# Altium PCB 底板20160428.PcbDoc (part 3 of 5)
Units mm, origin at the board's own origin, x right, y up, seen from the top; angles counter-clockwise.
Board outline 123.5 x 102.51 mm, 2 copper layers (Top Layer, Bottom Layer); 219 components, 217 nets, 791 pads, 260 vias.
Unrouted connection lines stored in the file: 1.
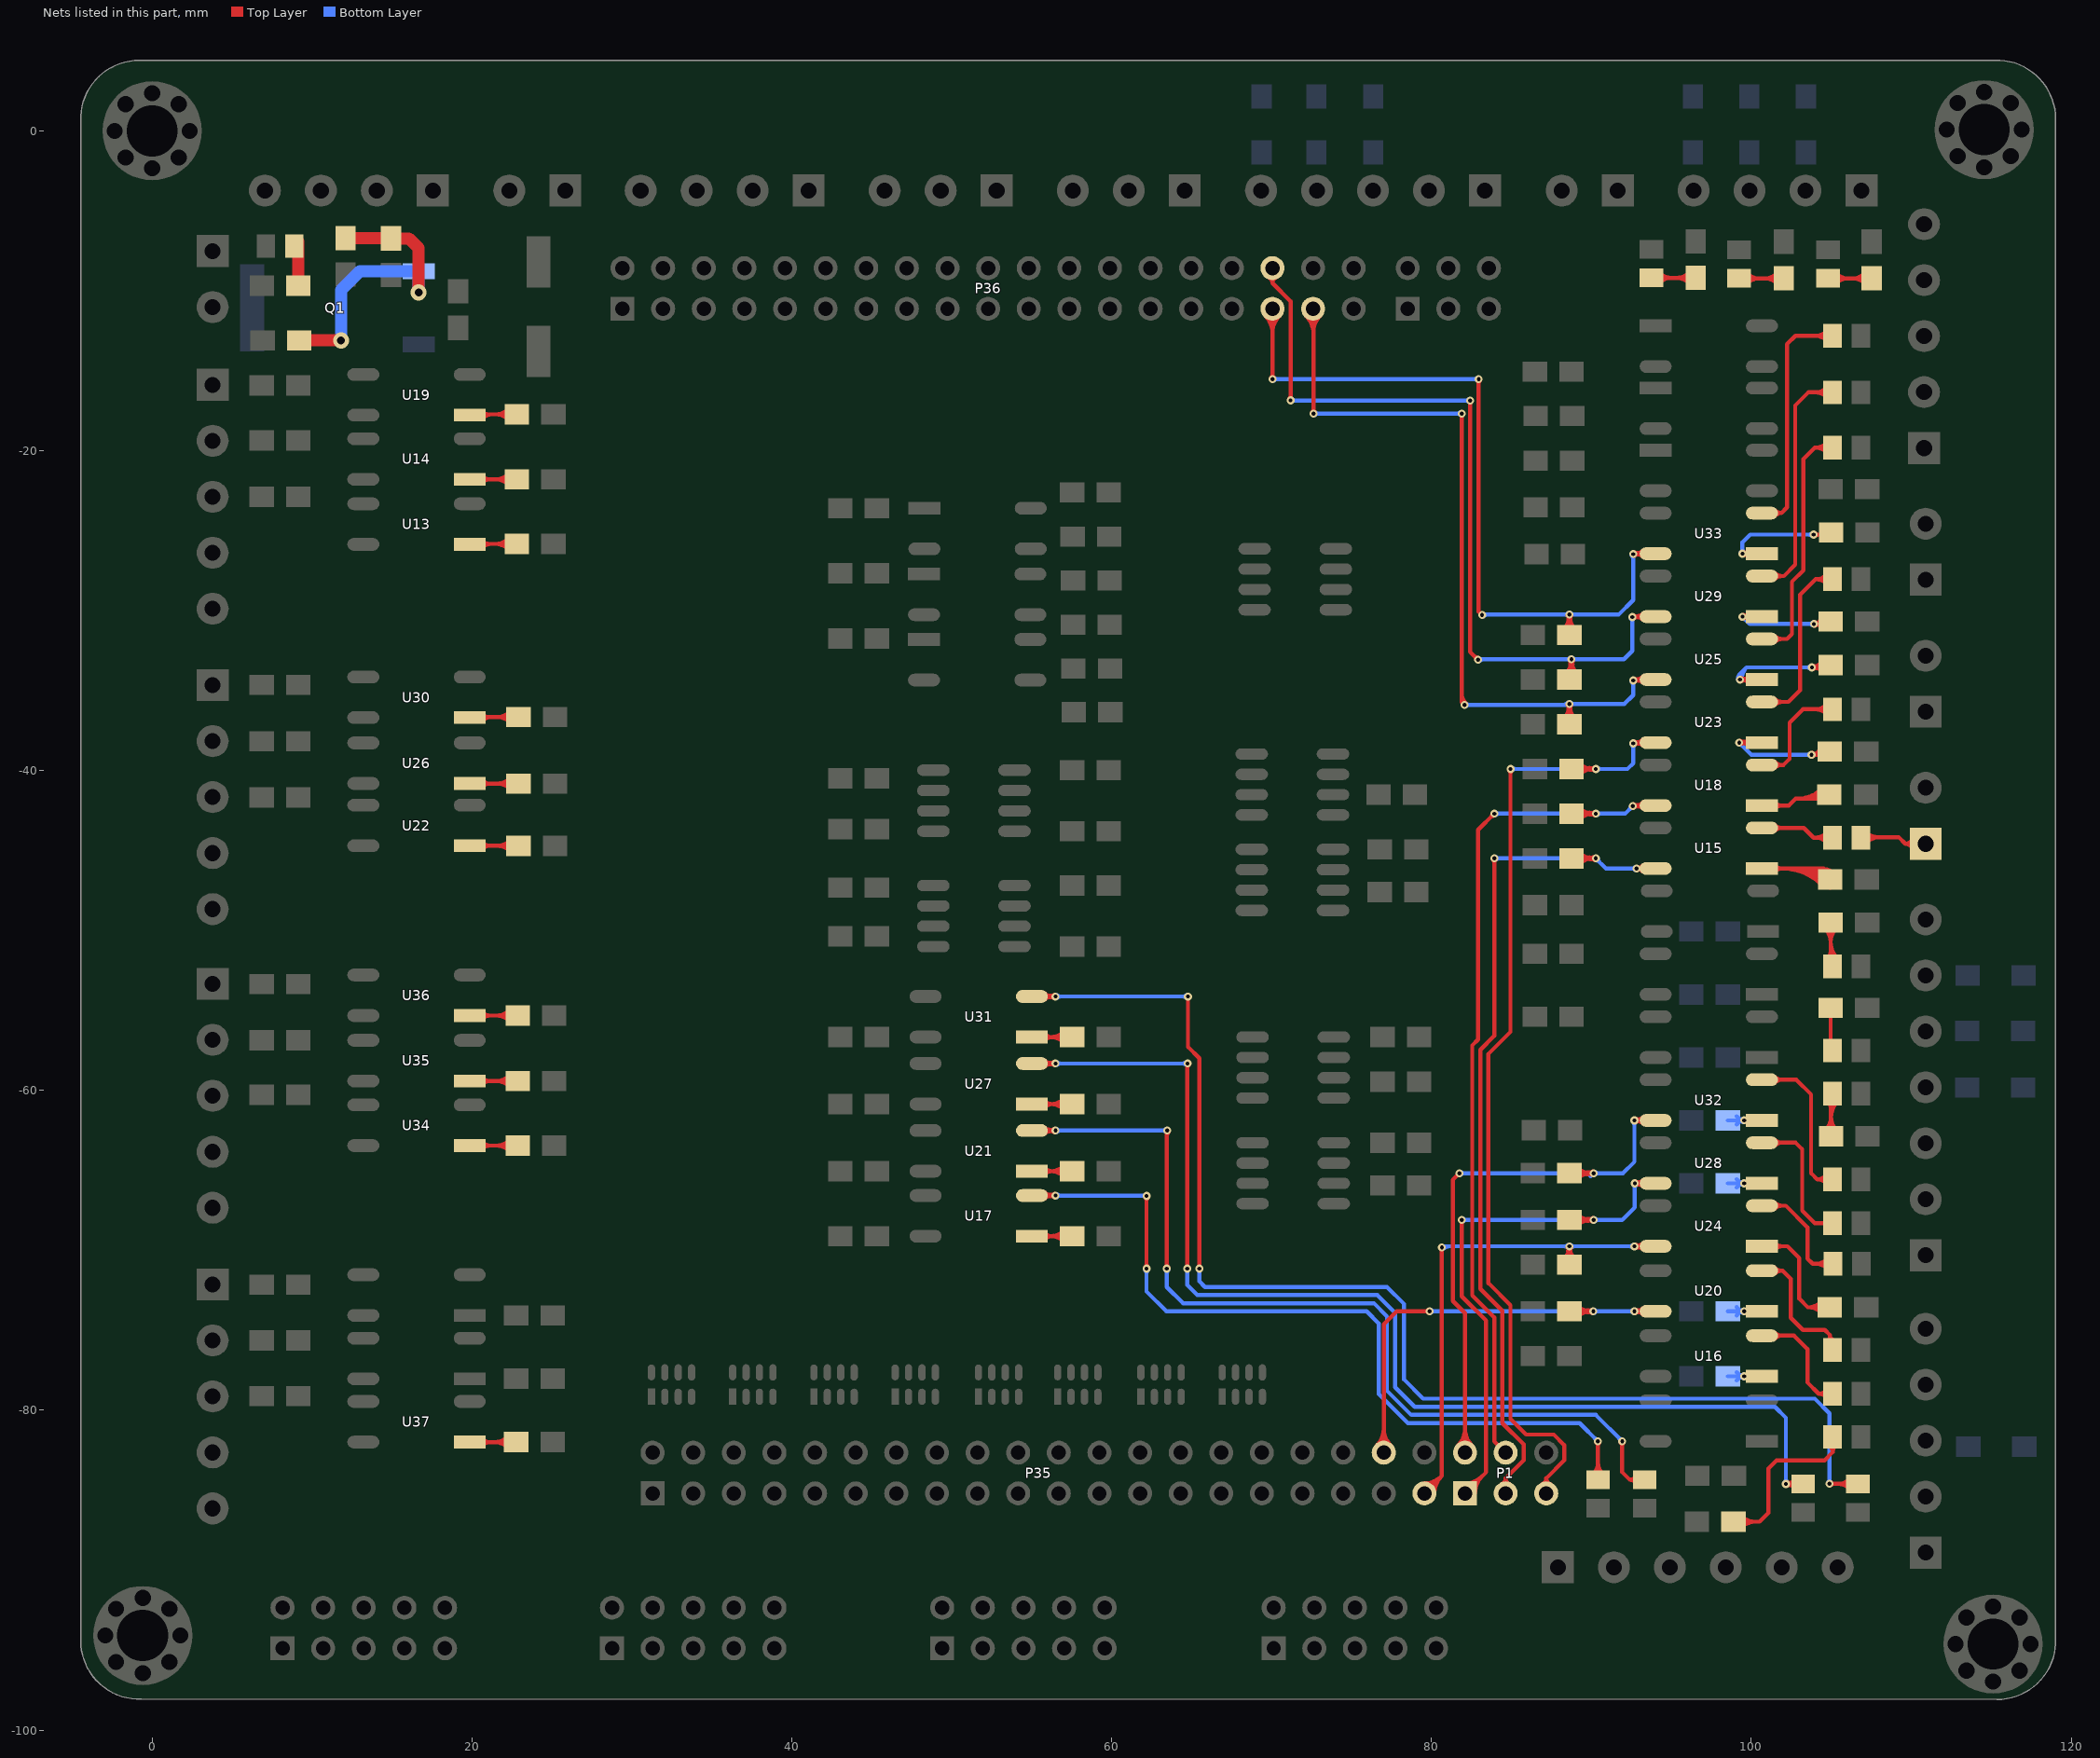
[diagram p3: the nets of this part, all layers, seen from the top]

## Via types
v1: diameter 0.5, hole 0.25, Top Layer to Bottom Layer, 233 vias
v2: diameter 1, hole 0.5, Top Layer to Bottom Layer, 27 vias

## Nets (pads, with @x,y where several pads share a name; then routed paths per layer and width w, separated by ;. In a path a pad name is that pad's centre, name@x,y a point inside that pad or via, vN(x,y) a via of type N, cw(c..) or ccw(c..) an arc to the next point about the centre after c; other vN are vias at no path point) (continued)
INPUT_30_B: P35.38 R58.1 U20.6 | length 38.8
  Top Layer w0.254: P35.38@76.572,-82.211 ccw(c75.509,-81.148) 77.013,-81.148 ccw(c78.517,-81.148) P35.38@77.453,-82.211 ; P35.38@76.752,-82.391 ccw(c76.122,-81.761) 77.013,-81.761 ccw(c77.904,-81.761) P35.38@77.274,-82.391 ; P35.38@77.013,-82.652 77.013,-74.625 77.826,-73.812 v1(79.883,-73.812) ; v1@79.796,-73.899 ccw(c79.586,-74.109) 79.586,-73.812 ccw(c79.586,-73.515) v1@79.796,-73.725 ; R58.1@88.621,-73.812 R58.1@88.621,-73.812 v1(90.119,-73.812) ; R58.1@89.107,-74.172 cw(c89.974,-75.039) 89.974,-73.812 cw(c89.974,-72.586) R58.1@89.107,-73.453 ; 89.735,-73.876 cw(c89.845,-74.287) v1@90.058,-73.919 ; 89.735,-73.748 ccw(c89.845,-73.338) v1@90.058,-73.706 ; v1@90.032,-73.899 ccw(c89.822,-74.109) 89.822,-73.812 ccw(c89.822,-73.515) v1@90.032,-73.725 ; v1@92.746,-73.919 cw(c92.926,-74.23) U20.6@93.019,-73.883 ; v1@92.746,-73.706 ccw(c92.922,-73.401) 93.013,-73.741 ; v1@92.772,-73.899 cw(c92.984,-74.112) 92.984,-73.811 ; v1@92.772,-73.725 ccw(c92.979,-73.518) 92.979,-73.811 ; v1@92.791,-73.874 cw(c93,-73.995) 92.938,-73.761 ; v1@92.791,-73.751 ccw(c92.994,-73.633) 92.934,-73.86 ; v1@92.812,-73.812 v1(92.685,-73.812) v1(92.685,-73.812) U20.6@94.01,-73.811 U20.6@94.082,-73.811 ; U20.6@93.217,-74.004 ccw(c92.751,-74.47) 92.751,-73.811 ccw(c92.751,-73.152) U20.6@93.217,-73.618
  Bottom Layer w0.254: v1(79.883,-73.812) v1(90.119,-73.812) v1(92.685,-73.812) 92.812,-73.812 v1@92.813,-73.811 ; v1@79.97,-73.899 cw(c80.18,-74.109) 80.18,-73.812 cw(c80.18,-73.515) v1@79.97,-73.725 ; v1@90.032,-73.899 ccw(c89.822,-74.109) 89.822,-73.812 ccw(c89.822,-73.515) v1@90.032,-73.725 ; v1@90.206,-73.899 cw(c90.416,-74.109) 90.416,-73.812 cw(c90.416,-73.515) v1@90.206,-73.725 ; v1@92.598,-73.899 ccw(c92.388,-74.109) 92.388,-73.812 ccw(c92.388,-73.515) v1@92.598,-73.725
INPUT_31_B: P35.39 R66.1 U24.6 | length 41.6
  Top Layer w0.254: P35.39@79.553,-85.192 80.641,-84.103 80.641,-70.913 v1(80.645,-69.825) ; P35.39@79.553,-84.823 ccw(c79.553,-83.932) 80.183,-84.562 ccw(c80.813,-85.192) P35.39@79.922,-85.192 ; P35.39@79.553,-84.569 ccw(c79.553,-83.065) 80.616,-84.128 ccw(c81.68,-85.192) P35.39@80.176,-85.192 ; R66.1@88.28,-70.514 ccw(c87.589,-69.748) v1(88.621,-69.748) ; v1@88.514,-69.81 cw(c88.257,-69.958) 88.544,-70.035 cw(c88.831,-70.112) v1@88.682,-69.855 ; v1@88.534,-69.835 cw(c88.324,-70.045) 88.621,-70.045 cw(c88.918,-70.045) v1@88.708,-69.835 ; v1@88.559,-69.855 cw(c88.411,-70.112) 88.697,-70.035 cw(c88.984,-69.958) v1@88.727,-69.81 ; R66.1@88.621,-70.891 v1(88.621,-69.748) ; R66.1@88.961,-70.514 cw(c89.652,-69.748) v1(88.621,-69.748) ; v1(92.685,-69.748) v1(92.685,-69.748) U24.6@94.01,-69.747 U24.6@94.082,-69.747 ; v1@92.746,-69.855 cw(c92.926,-70.166) U24.6@93.019,-69.819 ; v1@92.746,-69.642 ccw(c92.922,-69.337) 93.013,-69.677 ; v1@92.772,-69.835 cw(c92.984,-70.048) 92.984,-69.747 ; v1@92.772,-69.661 ccw(c92.979,-69.454) 92.979,-69.747 ; v1@92.791,-69.81 cw(c93,-69.931) 92.938,-69.697 ; v1@92.791,-69.687 ccw(c92.994,-69.569) 92.934,-69.796 ; U24.6@93.217,-69.94 ccw(c92.751,-70.406) 92.751,-69.747 ccw(c92.751,-69.088) U24.6@93.217,-69.554
  Bottom Layer w0.254: v1(80.645,-69.825) 80.721,-69.748 v1(88.621,-69.748) v1(92.685,-69.748) ; v1@80.732,-69.912 cw(c81.126,-70.306) 81.126,-69.748 ; v1@88.534,-69.835 ccw(c88.324,-70.045) 88.324,-69.748 ccw(c88.324,-69.451) v1@88.534,-69.661 ; v1@88.708,-69.835 cw(c88.918,-70.045) 88.918,-69.748 cw(c88.918,-69.451) v1@88.708,-69.661 ; v1@92.598,-69.835 ccw(c92.388,-70.045) 92.388,-69.748 ccw(c92.388,-69.451) v1@92.598,-69.661
INPUT_32_B: P1.1 R74.1 U28.6 | length 45
  Top Layer w0.254: v1(81.89,-68.097) 81.89,-72.873 83.414,-74.397 83.414,-83.871 P1.1@82.093,-85.192 ; P1.1@82.093,-84.823 ccw(c82.093,-83.932) 82.723,-84.562 ccw(c83.353,-85.192) P1.1@82.462,-85.192 ; P1.1@82.093,-84.569 ccw(c82.093,-83.065) 83.156,-84.128 ccw(c84.22,-85.192) P1.1@82.716,-85.192 ; R74.1@88.621,-68.097 v1(90.145,-68.097) ; R74.1@89.107,-68.457 cw(c89.974,-69.324) 89.974,-68.097 cw(c89.974,-66.871) R74.1@89.107,-67.738 ; 89.743,-68.159 cw(c89.859,-68.592) v1@90.083,-68.204 ; 89.743,-68.036 ccw(c89.859,-67.603) v1@90.083,-67.991 ; v1@90.058,-68.184 ccw(c89.848,-68.394) 89.848,-68.097 ccw(c89.848,-67.8) v1@90.058,-68.01 ; v1(92.71,-65.811) 94.009,-65.811 U28.6@94.01,-65.81 U28.6@94.082,-65.81 ; v1@92.749,-65.811 ccw(c92.749,-65.149) U28.6@93.217,-65.617 ; v1@92.754,-65.811 cw(c92.754,-66.467) U28.6@93.217,-66.003 ; v1@92.772,-65.918 cw(c92.939,-66.208) U28.6@93.026,-65.884 ; v1@92.771,-65.705 ccw(c92.937,-65.418) U28.6@93.023,-65.738 ; v1@92.797,-65.898 cw(c93.007,-66.108) 93.007,-65.811 cw(c93.007,-65.514) v1@92.797,-65.724 ; v1@92.817,-65.873 cw(c93.044,-66.004) 92.976,-65.75 ; v1@92.817,-65.75 ccw(c93.04,-65.621) 92.973,-65.87
  Bottom Layer w0.254: v1(81.89,-68.097) v1(90.145,-68.097) 91.923,-68.097 92.71,-67.31 v1(92.71,-65.811) ; v1@81.977,-68.184 cw(c82.187,-68.394) 82.187,-68.097 cw(c82.187,-67.8) v1@81.977,-68.01 ; v1@90.058,-68.184 ccw(c89.848,-68.394) 89.848,-68.097 ccw(c89.848,-67.8) v1@90.058,-68.01 ; v1@90.232,-68.184 cw(c90.442,-68.394) 90.442,-68.097 cw(c90.442,-67.8) v1@90.232,-68.01 ; v1@92.623,-65.898 cw(c92.413,-66.108) 92.71,-66.108 cw(c93.007,-66.108) v1@92.797,-65.898
INPUT_33_B: P1.2 R82.1 U32.6 | length 45.6
  Top Layer w0.254: P1.2@81.652,-82.211 ccw(c80.589,-81.148) 82.093,-81.148 ccw(c83.597,-81.148) P1.2@82.533,-82.211 ; v1(81.737,-65.176) 81.331,-65.583 81.331,-73.17 82.093,-73.932 P1.2@82.093,-82.652 ; P1.2@81.832,-82.391 ccw(c81.202,-81.761) 82.093,-81.761 ccw(c82.984,-81.761) P1.2@82.354,-82.391 ; R82.1@88.621,-65.176 v1(90.145,-65.176) ; R82.1@89.107,-65.536 cw(c89.974,-66.403) 89.974,-65.176 cw(c89.974,-63.95) R82.1@89.107,-64.817 ; 89.743,-65.238 cw(c89.859,-65.671) v1@90.083,-65.283 ; 89.743,-65.115 ccw(c89.859,-64.682) v1@90.083,-65.07 ; v1@90.058,-65.263 ccw(c89.848,-65.473) 89.848,-65.176 ccw(c89.848,-64.879) v1@90.058,-65.089 ; v1(92.685,-61.874) 94.009,-61.874 U32.6@94.01,-61.873 U32.6@94.082,-61.873 ; v1@92.746,-61.981 cw(c92.925,-62.291) U32.6@93.018,-61.945 ; v1@92.746,-61.768 ccw(c92.923,-61.462) 93.014,-61.803 ; v1@92.749,-61.874 ccw(c92.749,-61.212) U32.6@93.217,-61.68 ; v1@92.754,-61.874 cw(c92.754,-62.53) U32.6@93.217,-62.066 ; v1@92.772,-61.961 cw(c92.982,-62.171) 92.982,-61.874 cw(c92.982,-61.577) v1@92.772,-61.787 ; v1@92.791,-61.936 cw(c92.999,-62.056) 92.937,-61.824 ; v1@92.791,-61.813 ccw(c92.996,-61.695) 92.934,-61.923
  Bottom Layer w0.254: v1(81.737,-65.176) 89.757,-65.176 89.951,-65.37 v1(90.145,-65.176) 91.973,-65.176 92.685,-64.465 v1(92.685,-61.874) ; v1@81.824,-65.263 cw(c82.034,-65.473) 82.034,-65.176 cw(c82.034,-64.879) v1@81.824,-65.089 ; v1@90.232,-65.263 cw(c90.442,-65.473) 90.442,-65.176 cw(c90.442,-64.879) v1@90.232,-65.089 ; v1@92.598,-61.961 cw(c92.388,-62.171) 92.685,-62.171 cw(c92.982,-62.171) v1@92.772,-61.961
INPUT_34_B: P1.3 R49.1 U15.6 | length 62.1
  Top Layer w0.254: v1@83.835,-45.578 cw(c83.625,-45.788) 83.922,-45.788 cw(c84.219,-45.788) v1@84.009,-45.578 ; v1(83.922,-45.491) 83.922,-56.591 83.052,-57.461 83.052,-72.409 84.43,-73.787 84.43,-80.797 85.764,-82.132 85.764,-83.12 84.633,-84.251 ; P1.3@84.39,-84.618 ccw(c84.234,-84.251) 84.633,-84.251 ; P1.3@84.633,-85.192 84.633,-84.251 ; P1.3@84.876,-84.618 cw(c85.031,-84.251) 84.633,-84.251 ; R49.1@88.748,-45.491 v1(90.272,-45.491) ; R49.1@89.234,-45.851 cw(c90.101,-46.718) 90.101,-45.491 cw(c90.101,-44.265) R49.1@89.234,-45.132 ; 89.87,-45.553 cw(c89.986,-45.986) v1@90.21,-45.598 ; 89.87,-45.43 ccw(c89.986,-44.997) v1@90.21,-45.385 ; v1@90.185,-45.578 ccw(c89.975,-45.788) 89.975,-45.491 ccw(c89.975,-45.194) v1@90.185,-45.404 ; v1(92.812,-46.126) v1(92.812,-46.126) ; v1@92.88,-46.024 ccw(c93.011,-45.827) 93.073,-46.056 ccw(c93.133,-46.282) v1@92.922,-46.18 ; v1@92.882,-46.227 cw(c93.011,-46.411) 93.069,-46.194 cw(c93.128,-45.973) v1@92.922,-46.073 ; v1@92.899,-46.213 cw(c93.111,-46.426) U15.6@93.111,-46.125 ; v1@92.899,-46.039 ccw(c93.106,-45.832) U15.6@93.106,-46.125 ; U15.6@93.204,-46.304 ccw(c92.813,-46.643) v1(92.812,-46.126) ; U15.6@93.204,-45.947 cw(c92.813,-45.608) v1(92.812,-46.126) ; U15.6@94.082,-46.125 U15.6@94.01,-46.125 v1(92.812,-46.126)
  Bottom Layer w0.254: v1(83.922,-45.491) v1(90.272,-45.491) 90.907,-46.126 v1(92.812,-46.126) ; v1@84.009,-45.578 cw(c84.219,-45.788) 84.219,-45.491 cw(c84.219,-45.194) v1@84.009,-45.404 ; v1@90.185,-45.578 ccw(c89.975,-45.788) 89.975,-45.491 ccw(c89.975,-45.194) v1@90.185,-45.404 ; v1@90.272,-45.614 cw(c90.272,-45.911) 90.482,-45.701 cw(c90.692,-45.491) v1@90.395,-45.491 ; v1@92.725,-46.213 ccw(c92.515,-46.423) 92.515,-46.126 ccw(c92.515,-45.829) v1@92.725,-46.039
INPUT_35_B: P1.4 R57.1 U18.6 | length 60.8
  Top Layer w0.254: v1@83.799,-42.697 cw(c83.502,-42.697) 83.712,-42.907 cw(c83.922,-43.117) v1@83.922,-42.82 ; v1(83.922,-42.697) 82.906,-43.713 82.906,-56.82 82.544,-57.182 82.544,-72.815 83.922,-74.193 83.922,-81.94 P1.4@84.633,-82.652 ; R57.1@88.748,-42.697 v1(90.272,-42.697) ; R57.1@89.234,-43.057 cw(c90.101,-43.924) 90.101,-42.697 cw(c90.101,-41.471) R57.1@89.234,-42.338 ; 89.87,-42.759 cw(c89.986,-43.192) v1@90.21,-42.804 ; 89.87,-42.636 ccw(c89.986,-42.203) v1@90.21,-42.591 ; v1@90.185,-42.784 ccw(c89.975,-42.994) 89.975,-42.697 ccw(c89.975,-42.4) v1@90.185,-42.61 ; v1(92.583,-42.215) 92.609,-42.188 U18.6@94.01,-42.188 U18.6@94.082,-42.188 ; v1@92.645,-42.108 ccw(c92.824,-41.798) 92.916,-42.144 ; v1@92.66,-42.31 cw(c92.876,-42.577) 92.965,-42.246 ; v1@92.67,-42.302 cw(c92.944,-42.576) 92.944,-42.188 ; v1@92.69,-42.276 cw(c92.893,-42.394) 92.833,-42.167 ; U18.6@93.217,-42.381 ccw(c92.751,-42.847) 92.751,-42.188 ccw(c92.751,-41.529) U18.6@93.217,-41.995
  Bottom Layer w0.254: v1(83.922,-42.697) v1(90.272,-42.697) 92.1,-42.697 v1(92.583,-42.215) ; v1@84.009,-42.784 cw(c84.219,-42.994) 84.219,-42.697 cw(c84.219,-42.4) v1@84.009,-42.61 ; v1@90.185,-42.784 ccw(c89.975,-42.994) 89.975,-42.697 ccw(c89.975,-42.4) v1@90.185,-42.61 ; v1@90.359,-42.784 cw(c90.569,-42.994) 90.569,-42.697 cw(c90.569,-42.4) v1@90.359,-42.61 ; v1@92.46,-42.215 cw(c92.163,-42.215) 92.373,-42.425 cw(c92.583,-42.635) v1@92.583,-42.338
INPUT_36_B: P1.5 R65.1 U23.6 | length 69.7
  Top Layer w0.254: v1@84.851,-39.99 cw(c84.641,-40.2) 84.938,-40.2 cw(c85.235,-40.2) v1@85.025,-39.99 ; v1(84.938,-39.903) 84.938,-56.337 83.56,-57.715 83.56,-72.053 84.938,-73.431 84.938,-80.543 85.915,-81.521 87.641,-81.521 88.304,-82.183 88.304,-83.12 87.173,-84.251 ; P1.5@86.93,-84.618 ccw(c86.774,-84.251) 87.173,-84.251 ; P1.5@87.173,-85.192 87.173,-84.251 ; P1.5@87.416,-84.618 cw(c87.571,-84.251) 87.173,-84.251 ; R65.1@88.748,-39.903 v1(90.272,-39.903) ; R65.1@89.234,-40.263 cw(c90.101,-41.13) 90.101,-39.903 cw(c90.101,-38.677) R65.1@89.234,-39.544 ; 89.87,-39.965 cw(c89.986,-40.398) v1@90.21,-40.01 ; 89.87,-39.842 ccw(c89.986,-39.409) v1@90.21,-39.797 ; v1@90.185,-39.99 ccw(c89.975,-40.2) 89.975,-39.903 ccw(c89.975,-39.606) v1@90.185,-39.816 ; v1(92.608,-38.303) 93.958,-38.303 U23.6@94.01,-38.251 U23.6@94.082,-38.251 ; v1@92.626,-38.303 ccw(c92.626,-37.467) U23.6@93.217,-38.058 ; v1@92.67,-38.197 ccw(c92.826,-37.926) 92.907,-38.228 ; v1@92.695,-38.39 cw(c92.905,-38.6) 92.905,-38.303 cw(c92.905,-38.006) v1@92.695,-38.216 ; v1@92.715,-38.365 cw(c92.959,-38.505) 92.886,-38.234 ; 92.876,-38.303 cw(c92.876,-38.785) U23.6@93.217,-38.444
  Bottom Layer w0.254: v1(84.938,-39.903) v1(90.272,-39.903) 92.253,-39.903 92.608,-39.548 v1(92.608,-38.303) ; v1@85.025,-39.99 cw(c85.235,-40.2) 85.235,-39.903 cw(c85.235,-39.606) v1@85.025,-39.816 ; v1@90.185,-39.99 ccw(c89.975,-40.2) 89.975,-39.903 ccw(c89.975,-39.606) v1@90.185,-39.816 ; v1@90.359,-39.99 cw(c90.569,-40.2) 90.569,-39.903 cw(c90.569,-39.606) v1@90.359,-39.816 ; v1@92.521,-38.39 cw(c92.311,-38.6) 92.608,-38.6 cw(c92.905,-38.6) v1@92.695,-38.39
INPUT_37_B: P36.35 R67.1 U25.6 | length 61.8
  Top Layer w0.254: P36.35@72.153,-11.566 cw(c71.028,-12.691) 72.619,-12.691 ; P36.35@72.332,-11.386 cw(c71.641,-12.077) 72.619,-12.077 ; v1@72.532,-17.591 ccw(c72.322,-17.381) 72.619,-17.381 ccw(c72.916,-17.381) v1@72.706,-17.591 ; v1(72.619,-17.678) P36.35@72.619,-11.151 ; 72.619,-12.568 cw(c74.036,-12.568) P36.35@73.034,-11.566 ; 72.619,-11.955 cw(c73.423,-11.955) P36.35@72.854,-11.386 ; 81.89,-35.164 ccw(c82.794,-35.164) v1@82.154,-35.803 ; v1(81.89,-17.678) 81.89,-35.712 ; v1@81.945,-35.875 ccw(c81.751,-35.851) 81.89,-35.712 ; v1@82.052,-35.768 cw(c82.028,-35.574) 81.89,-35.712 ; v1(82.067,-35.89) 81.89,-35.712 ; R67.1@88.261,-36.75 ccw(c87.394,-35.883) 88.621,-35.883 ccw(c89.847,-35.883) R67.1@88.98,-36.75 ; v1@88.514,-35.901 cw(c88.224,-36.069) 88.548,-36.155 ; v1@88.534,-35.926 cw(c88.324,-36.136) 88.621,-36.136 cw(c88.918,-36.136) v1@88.708,-35.926 ; v1@88.559,-35.946 cw(c88.43,-36.17) 88.68,-36.103 ; 88.562,-36.103 cw(c88.811,-36.17) v1@88.682,-35.946 ; R67.1@88.621,-37.109 v1(88.621,-35.839) ; 88.694,-36.155 cw(c89.018,-36.069) v1@88.727,-35.901 ; v1(92.608,-34.366) 93.958,-34.366 U25.6@94.01,-34.314 U25.6@94.082,-34.314 ; v1@92.626,-34.366 ccw(c92.626,-33.53) U25.6@93.217,-34.121 ; v1@92.67,-34.26 ccw(c92.826,-33.989) 92.907,-34.291 ; v1@92.695,-34.453 cw(c92.905,-34.663) 92.905,-34.366 cw(c92.905,-34.069) v1@92.695,-34.279 ; v1@92.715,-34.428 cw(c92.959,-34.568) 92.886,-34.297 ; 92.876,-34.366 cw(c92.876,-34.848) U25.6@93.217,-34.507
  Bottom Layer w0.254: v1(72.619,-17.678) v1(81.89,-17.678) ; v1@72.706,-17.765 cw(c72.916,-17.975) 72.916,-17.678 cw(c72.916,-17.381) v1@72.706,-17.591 ; v1@81.803,-17.765 ccw(c81.593,-17.975) 81.593,-17.678 ccw(c81.593,-17.381) v1@81.803,-17.591 ; v1(82.067,-35.89) 88.57,-35.89 v1(88.621,-35.839) 92.05,-35.839 92.608,-35.281 v1(92.608,-34.366) ; v1@82.154,-35.977 cw(c82.364,-36.187) 82.364,-35.89 cw(c82.364,-35.593) v1@82.154,-35.803 ; 88.201,-35.89 ccw(c88.201,-35.42) v1@88.534,-35.752 ; v1@88.708,-35.926 cw(c88.918,-36.136) 88.918,-35.839 cw(c88.918,-35.542) v1@88.708,-35.752 ; v1@92.521,-34.453 cw(c92.311,-34.663) 92.608,-34.663 cw(c92.905,-34.663) v1@92.695,-34.453
INPUT_38_B: P36.34 R75.1 U29.6 | length 60.9
  Top Layer w0.254: P36.34@69.81,-9.159 cw(c69.655,-9.526) 70.053,-9.526 ; P36.34@70.053,-8.585 70.053,-9.526 ; P36.34@70.296,-9.159 ccw(c70.452,-9.526) 70.053,-9.526 ; v1@71.097,-16.767 ccw(c70.887,-16.557) 71.184,-16.557 ccw(c71.481,-16.557) v1@71.271,-16.767 ; v1(71.184,-16.854) 71.184,-10.657 70.053,-9.526 ; v1(82.419,-16.87) 82.419,-32.584 v1(82.906,-33.071) ; v1@82.783,-33.071 ccw(c82.486,-33.071) 82.696,-32.861 ccw(c82.906,-32.651) v1@82.906,-32.948 ; R75.1@88.388,-33.956 ccw(c87.521,-33.089) 88.748,-33.089 ccw(c89.974,-33.089) R75.1@89.107,-33.956 ; R75.1@88.621,-34.315 88.748,-34.188 v1(88.748,-33.045) ; v1@88.641,-33.107 cw(c88.351,-33.275) 88.675,-33.361 ; v1@88.661,-33.132 cw(c88.451,-33.342) 88.748,-33.342 cw(c89.045,-33.342) v1@88.835,-33.132 ; v1@88.686,-33.152 cw(c88.557,-33.376) 88.807,-33.309 ; 88.689,-33.309 cw(c88.938,-33.376) v1@88.809,-33.152 ; 88.821,-33.361 cw(c89.145,-33.275) v1@88.854,-33.107 ; v1(92.558,-30.404) 93.984,-30.404 U29.6@94.01,-30.377 U29.6@94.082,-30.377 ; v1@92.619,-30.297 ccw(c92.825,-29.941) 92.931,-30.338 ; v1@92.645,-30.491 cw(c92.855,-30.701) 92.855,-30.404 cw(c92.855,-30.107) v1@92.645,-30.317 ; v1@92.687,-30.404 ccw(c92.687,-29.655) U29.6@93.217,-30.184 ; 92.815,-30.404 cw(c92.815,-30.973) U29.6@93.217,-30.57
  Bottom Layer w0.254: v1@71.184,-16.866 71.188,-16.87 v1(82.419,-16.87) ; v1@71.271,-16.941 cw(c71.443,-17.112) 71.443,-16.87 ; v1@71.271,-16.767 ccw(c71.52,-16.518) 71.52,-16.87 ; v1@82.332,-16.957 ccw(c82.122,-17.167) 82.122,-16.87 ccw(c82.122,-16.573) v1@82.332,-16.783 ; v1@82.906,-33.045 v1(88.748,-33.045) 92.024,-33.045 92.558,-32.512 v1(92.558,-30.404) ; v1@82.993,-33.158 cw(c83.264,-33.429) 83.264,-33.045 ; v1@88.661,-33.132 ccw(c88.451,-33.342) 88.451,-33.045 ccw(c88.451,-32.748) v1@88.661,-32.958 ; v1@88.835,-33.132 cw(c89.045,-33.342) 89.045,-33.045 cw(c89.045,-32.748) v1@88.835,-32.958 ; v1@92.471,-30.491 cw(c92.261,-30.701) 92.558,-30.701 cw(c92.855,-30.701) v1@92.645,-30.491
INPUT_39_B: P36.33 R83.1 U33.6 | length 60.3
  Top Layer w0.254: P36.33@69.613,-11.566 cw(c68.549,-12.629) 70.053,-12.629 cw(c71.557,-12.629) P36.33@70.494,-11.566 ; P36.33@69.792,-11.386 cw(c69.162,-12.016) 70.053,-12.016 cw(c70.944,-12.016) P36.33@70.314,-11.386 ; v1@69.966,-15.432 ccw(c69.756,-15.222) 70.053,-15.222 ccw(c70.35,-15.222) v1@70.14,-15.432 ; v1(70.053,-15.519) P36.33@70.053,-11.125 ; v1@82.861,-15.614 cw(c82.651,-15.824) 82.948,-15.824 cw(c83.245,-15.824) v1@83.035,-15.614 ; v1(82.948,-15.527) 82.948,-30.066 v1(83.16,-30.277) ; R83.1@88.261,-31.162 ccw(c87.394,-30.295) 88.621,-30.295 ccw(c89.847,-30.295) R83.1@88.98,-31.162 ; v1@88.514,-30.313 cw(c88.224,-30.481) 88.548,-30.567 ; v1@88.534,-30.338 cw(c88.324,-30.548) 88.621,-30.548 cw(c88.918,-30.548) v1@88.708,-30.338 ; v1@88.559,-30.358 cw(c88.43,-30.582) 88.68,-30.515 ; 88.562,-30.515 cw(c88.811,-30.582) v1@88.682,-30.358 ; R83.1@88.621,-31.521 v1(88.621,-30.251) ; 88.694,-30.567 cw(c89.018,-30.481) v1@88.727,-30.313 ; v1(92.608,-26.467) 92.635,-26.44 U33.6@94.01,-26.44 U33.6@94.082,-26.44 ; v1@92.67,-26.36 ccw(c92.838,-26.069) 92.925,-26.394 ; v1@92.686,-26.562 cw(c92.892,-26.816) 92.976,-26.501 ; v1@92.695,-26.554 cw(c92.969,-26.828) 92.969,-26.44 ; v1@92.715,-26.528 cw(c92.938,-26.657) 92.872,-26.408 ; U33.6@93.217,-26.633 ccw(c92.751,-27.099) 92.751,-26.44 ccw(c92.751,-25.781) U33.6@93.217,-26.247
  Bottom Layer w0.254: v1(70.053,-15.519) 70.061,-15.527 v1(82.948,-15.527) ; v1@70.14,-15.606 cw(c70.331,-15.797) 70.331,-15.527 ; v1@70.14,-15.432 ccw(c70.369,-15.203) 70.369,-15.527 ; v1@82.861,-15.614 ccw(c82.651,-15.824) 82.651,-15.527 ccw(c82.651,-15.23) v1@82.861,-15.44 ; v1@83.16,-30.251 v1(88.621,-30.251) 91.694,-30.251 92.608,-29.337 v1(92.608,-26.467) ; v1@83.247,-30.364 cw(c83.518,-30.635) 83.518,-30.251 ; v1@88.534,-30.338 ccw(c88.324,-30.548) 88.324,-30.251 ccw(c88.324,-29.954) v1@88.534,-30.164 ; v1@88.708,-30.338 cw(c88.918,-30.548) 88.918,-30.251 cw(c88.918,-29.954) v1@88.708,-30.164 ; v1@92.521,-26.554 cw(c92.311,-26.764) 92.608,-26.764 cw(c92.905,-26.764) v1@92.695,-26.554
JT_KR1: D14.K P47.1 | length 6.8
  Top Layer w0.254: D14.K@107.179,-44.516 cw(c108.03,-45.367) 108.03,-44.164 ; D14.K@107.179,-43.876 ccw(c107.875,-43.18) 107.875,-44.164 ; D14.K@107.206,-44.164 109.213,-44.164 109.626,-44.577 ; P47.1@110.081,-44.89 ccw(c109.626,-45.064) 109.626,-44.577 ; P47.1@110.081,-44.264 cw(c109.626,-44.09) 109.626,-44.577 ; P47.1@110.896,-44.577 109.626,-44.577
NetC1_2: C1.2 Q1.1 R1.1 R2.1 | length 20.6
  Top Layer w0.762: R2.1@9.195,-13.106 v2(11.811,-13.106) ; C1.2@12.09,-6.706 14.91,-6.706 R1.1@14.935,-6.731 16.053,-6.731 16.662,-7.341 v2(16.662,-10.109) ; 14.261,-6.706 cw(c14.261,-7.406) R1.1@14.756,-6.911
  Bottom Layer w0.762: v2(11.811,-13.106) 11.811,-9.957 12.979,-8.788 Q1.1@16.662,-8.788 v2(16.662,-10.109)
NetD14_A: D14.A U15.3 | length 7.4
  Top Layer w0.254: U15.3@100.66,-43.585 103.275,-43.585 103.886,-44.196 D14.A@105.079,-44.196 ; U15.3@101.453,-43.778 cw(c101.919,-44.244) 101.919,-43.585 cw(c101.919,-42.926) U15.3@101.453,-43.392 ; D14.A@104.758,-44.516 ccw(c103.985,-45.29) 103.985,-44.196 ccw(c103.985,-43.102) D14.A@104.758,-43.876
NetD15_A: D15.A U16.3 | length 9.3
  Top Layer w0.254: U16.3@100.66,-75.335 102.666,-75.335 103.505,-76.175 103.505,-78.257 104.216,-78.969 ; U16.3@101.453,-75.528 cw(c101.919,-75.994) 101.919,-75.335 cw(c101.919,-74.676) U16.3@101.453,-75.142 ; D15.A@104.706,-79.226 ccw(c104.216,-79.563) 104.216,-78.969 ; D15.A@104.706,-78.711 cw(c104.216,-78.374) 104.216,-78.969 ; D15.A@105.079,-78.969 104.216,-78.969
NetD16_A: D16.A U17.3 | length 57.3
  Top Layer w0.254: U17.3@55.012,-66.572 v1(56.49,-66.573) ; U17.3@55.805,-66.765 cw(c56.271,-67.231) 56.271,-66.572 cw(c56.271,-65.913) U17.3@55.805,-66.379 ; 56.053,-66.631 cw(c56.181,-67.108) v1@56.428,-66.68 ; 56.059,-66.516 ccw(c56.185,-66.045) v1@56.428,-66.467 ; 56.19,-66.572 cw(c56.19,-66.873) v1@56.403,-66.66 ; 56.195,-66.572 ccw(c56.195,-66.279) v1@56.403,-66.486 ; v1@62.092,-71.058 ccw(c61.882,-70.848) 62.179,-70.848 ccw(c62.476,-70.848) v1@62.266,-71.058 ; v1@62.092,-66.686 cw(c61.882,-66.896) 62.179,-66.896 cw(c62.476,-66.896) v1@62.266,-66.686 ; v1(62.179,-71.145) v1(62.179,-66.599) ; D16.A@90.085,-84.024 ccw(c89.312,-83.251) 90.405,-83.251 ccw(c91.499,-83.251) D16.A@90.726,-84.024 ; v1@90.318,-82.034 cw(c90.108,-82.244) 90.405,-82.244 cw(c90.702,-82.244) v1@90.492,-82.034 ; D16.A@90.405,-84.345 v1(90.405,-81.947)
  Bottom Layer w0.254: v1(56.49,-66.573) 62.154,-66.573 v1(62.179,-66.599) ; v1@56.577,-66.66 cw(c56.787,-66.87) 56.787,-66.573 cw(c56.787,-66.276) v1@56.577,-66.486 ; 61.821,-66.573 cw(c61.821,-66.957) v1@62.092,-66.686 ; v1@62.092,-71.232 cw(c61.882,-71.442) 62.179,-71.442 cw(c62.476,-71.442) v1@62.266,-71.232 ; v1(62.179,-71.145) 62.179,-72.568 63.424,-73.812 75.946,-73.812 76.708,-74.574 76.708,-78.983 78.522,-80.797 89.256,-80.797 v1(90.405,-81.947) ; v1@90.282,-81.947 ccw(c89.985,-81.947) 90.195,-81.737 ccw(c90.405,-81.527) v1@90.405,-81.824
NetD18_A: D18.A U18.3 | length 9.9
  Top Layer w0.254: U18.3@100.66,-39.648 102.007,-39.648 102.387,-39.268 102.387,-37.008 103.226,-36.17 D18.A@105.079,-36.17 ; U18.3@101.453,-39.841 cw(c101.919,-40.307) 101.919,-39.648 cw(c101.919,-38.989) U18.3@101.453,-39.455 ; D18.A@104.758,-36.49 ccw(c103.985,-37.263) 103.985,-36.17 ccw(c103.985,-35.076) D18.A@104.758,-35.849
NetD19_A: D19.A U20.3 | length 10.1
  Top Layer w0.254: U20.3@100.732,-71.271 101.955,-71.271 102.464,-71.78 102.464,-74.219 103.219,-74.974 104.59,-74.974 104.902,-75.286 ; U20.3@101.453,-71.464 cw(c101.919,-71.93) 101.919,-71.271 cw(c101.919,-70.612) U20.3@101.453,-71.078 ; D19.A@104.758,-75.75 ccw(c104.412,-75.404) 104.902,-75.404 ; D19.A@104.902,-76.225 104.902,-75.286 ; D19.A@105.177,-75.628 cw(c105.253,-75.286) 104.902,-75.286
NetD20_A: D20.A U21.3 | length 63.3
  Top Layer w0.254: U21.3@55.012,-62.508 v1(56.49,-62.509) ; U21.3@55.805,-62.701 cw(c56.271,-63.167) 56.271,-62.508 cw(c56.271,-61.849) U21.3@55.805,-62.315 ; 56.053,-62.567 cw(c56.181,-63.044) v1@56.428,-62.616 ; 56.059,-62.452 ccw(c56.185,-61.981) v1@56.428,-62.403 ; 56.19,-62.508 cw(c56.19,-62.809) v1@56.403,-62.596 ; 56.195,-62.508 ccw(c56.195,-62.215) v1@56.403,-62.422 ; v1@63.362,-71.058 ccw(c63.152,-70.848) 63.449,-70.848 ccw(c63.746,-70.848) v1@63.536,-71.058 ; v1(63.449,-71.145) 63.449,-62.535 v1(63.475,-62.509) ; 63.449,-62.868 cw(c63.833,-62.868) v1@63.562,-62.596 ; v1@91.836,-82.027 cw(c91.626,-82.237) 91.923,-82.237 cw(c92.22,-82.237) v1@92.01,-82.027 ; v1(91.923,-81.94) 91.923,-83.871 92.396,-84.345 ; D20.A@92.777,-84.567 ccw(c92.396,-84.781) 92.396,-84.345 ; D20.A@92.777,-84.122 cw(c92.396,-83.908) 92.396,-84.345 ; D20.A@93.326,-84.345 92.396,-84.345
  Bottom Layer w0.254: v1(56.49,-62.509) v1(63.475,-62.509) ; v1@56.577,-62.596 cw(c56.787,-62.806) 56.787,-62.509 cw(c56.787,-62.212) v1@56.577,-62.422 ; v1@63.362,-71.232 cw(c63.152,-71.442) 63.449,-71.442 cw(c63.746,-71.442) v1@63.536,-71.232 ; v1@63.388,-62.596 ccw(c63.178,-62.806) 63.178,-62.509 ccw(c63.178,-62.212) v1@63.388,-62.422 ; v1(63.449,-71.145) 63.449,-72.288 64.465,-73.304 76.396,-73.304 77.216,-74.124 77.216,-78.773 78.733,-80.289 90.272,-80.289 v1(91.923,-81.94) ; v1@91.8,-81.94 ccw(c91.503,-81.94) 91.713,-81.73 ccw(c91.923,-81.52) v1@91.923,-81.817
NetD22_A: D22.A U23.3 | length 13.8
  Top Layer w0.254: U23.3@100.66,-35.711 102.312,-35.711 103.048,-34.976 103.048,-29.007 104.02,-28.035 ; U23.3@101.453,-35.904 cw(c101.919,-36.37) 101.919,-35.711 cw(c101.919,-35.052) U23.3@101.453,-35.518 ; D22.A@104.751,-28.348 ccw(c104.02,-29.046) 104.02,-28.035 ; D22.A@104.751,-27.722 cw(c104.02,-27.024) 104.02,-28.035 ; D22.A@105.079,-28.035 104.02,-28.035
NetD23_A: D23.A U24.3 | length 9.8
  Top Layer w0.254: U24.3@100.66,-67.207 102.151,-67.207 103.505,-68.562 103.505,-70.51 103.835,-70.841 D23.A@105.104,-70.841 ; U24.3@101.453,-67.4 cw(c101.919,-67.866) 101.919,-67.207 cw(c101.919,-66.548) U24.3@101.453,-67.014 ; D23.A@104.784,-71.161 ccw(c104.011,-71.934) 104.011,-70.841 ccw(c104.011,-69.747) D23.A@104.784,-70.52
NetD24_A: D24.A U25.3 | length 18.1
  Top Layer w0.254: U25.3@100.66,-31.774 102.236,-31.774 102.54,-31.471 102.54,-28.194 103.251,-27.483 103.251,-20.523 103.962,-19.812 D24.A@105.079,-19.812 ; U25.3@101.453,-31.967 cw(c101.919,-32.433) 101.919,-31.774 cw(c101.919,-31.115) U25.3@101.453,-31.581 ; D24.A@104.758,-20.132 ccw(c103.985,-20.906) 103.985,-19.812 ccw(c103.985,-18.718) D24.A@104.758,-19.492
NetD26_A: D26.A U27.3 | length 78.7
  Top Layer w0.254: U27.3@55.013,-58.318 v1(56.49,-58.318) ; U27.3@55.805,-58.51 cw(c56.268,-58.974) v1@56.268,-58.318 ; U27.3@55.805,-58.124 ccw(c56.273,-57.656) v1@56.273,-58.318 ; 56.054,-58.376 cw(c56.182,-58.851) v1@56.428,-58.425 ; 56.058,-58.261 ccw(c56.184,-57.789) v1@56.428,-58.212 ; v1@56.403,-58.405 ccw(c56.193,-58.615) 56.193,-58.318 ccw(c56.193,-58.021) v1@56.403,-58.231 ; v1(64.719,-71.145) 64.719,-58.598 ; 64.719,-58.599 cw(c64.936,-58.599) v1@64.814,-58.42 ; v1@102.22,-84.714 cw(c102.369,-84.971) 102.446,-84.684 cw(c102.522,-84.397) v1@102.265,-84.546 ; v1@102.22,-84.501 ccw(c102.369,-84.244) 102.446,-84.531 ccw(c102.522,-84.817) v1@102.265,-84.669 ; v1@102.246,-84.694 cw(c102.456,-84.904) 102.456,-84.607 cw(c102.456,-84.31) v1@102.246,-84.52 ; D26.A@102.714,-84.328 cw(c102.159,-83.916) v1(102.159,-84.607) ; D26.A@102.722,-84.88 ccw(c102.159,-85.326) v1(102.159,-84.607) ; D26.A@103.232,-84.599 103.224,-84.607 v1(102.159,-84.607)
  Bottom Layer w0.254: v1(56.49,-58.318) v1(64.745,-58.318) ; v1@56.577,-58.405 cw(c56.787,-58.615) 56.787,-58.318 cw(c56.787,-58.021) v1@56.577,-58.231 ; v1@64.658,-58.405 ccw(c64.448,-58.615) 64.448,-58.318 ccw(c64.448,-58.021) v1@64.658,-58.231 ; v1(64.719,-71.145) 64.719,-72.161 65.354,-72.796 76.606,-72.796 77.724,-73.914 77.724,-78.562 78.943,-79.781 101.473,-79.781 102.159,-80.467 v1(102.159,-84.607) ; v1@102.072,-84.52 ccw(c101.862,-84.31) 102.159,-84.31 ccw(c102.456,-84.31) v1@102.246,-84.52
NetD27_A: D27.A U28.3 | length 9.8
  Top Layer w0.254: U28.3@100.66,-63.27 102.767,-63.27 103.175,-63.678 103.175,-67.513 103.962,-68.301 D27.A@105.079,-68.301 ; U28.3@101.453,-63.463 cw(c101.919,-63.929) 101.919,-63.27 cw(c101.919,-62.611) U28.3@101.453,-63.077
NetD28_A: D28.A U29.3 | length 17.8
  Top Layer w0.254: U29.3@100.66,-27.837 102.033,-27.837 102.743,-27.127 102.743,-17.17 103.563,-16.351 D28.A@105.079,-16.351 ; U29.3@101.453,-28.03 cw(c101.919,-28.496) 101.919,-27.837 cw(c101.919,-27.178) U29.3@101.453,-27.644 ; D28.A@104.758,-16.671 ccw(c103.985,-17.444) 103.985,-16.351 ccw(c103.985,-15.257) D28.A@104.758,-16.031
NetD30_A: D30.A U31.3 | length 85.5
  Top Layer w0.254: U31.3@55.013,-54.127 v1(56.49,-54.127) ; U31.3@55.805,-54.319 cw(c56.268,-54.783) v1@56.268,-54.127 ; U31.3@55.805,-53.933 ccw(c56.273,-53.465) v1@56.273,-54.127 ; 56.054,-54.185 cw(c56.182,-54.66) v1@56.428,-54.234 ; 56.058,-54.07 ccw(c56.184,-53.598) v1@56.428,-54.021 ; v1@56.403,-54.214 ccw(c56.193,-54.424) 56.193,-54.127 ccw(c56.193,-53.83) v1@56.403,-54.04 ; v1(64.77,-54.127) 64.77,-57.277 65.481,-57.988 v1(65.481,-71.145) ; v1(104.884,-84.6) D30.A@106.661,-84.599 ; v1@104.971,-84.686 cw(c105.181,-84.896) 105.181,-84.6 cw(c105.181,-84.303) v1@104.971,-84.513 ; 105.41,-84.6 ccw(c105.41,-83.502) D30.A@106.186,-84.278 ; 105.415,-84.6 cw(c105.415,-85.69) D30.A@106.186,-84.919
  Bottom Layer w0.254: v1(56.49,-54.127) v1(64.77,-54.127) ; v1@56.577,-54.214 cw(c56.787,-54.424) 56.787,-54.127 cw(c56.787,-53.83) v1@56.577,-54.04 ; v1@64.683,-54.214 ccw(c64.473,-54.424) 64.473,-54.127 ccw(c64.473,-53.83) v1@64.683,-54.04 ; v1(65.481,-71.145) 65.481,-71.933 65.837,-72.288 77.216,-72.288 78.283,-73.355 78.283,-78.08 79.477,-79.273 103.962,-79.273 104.884,-80.196 v1(104.884,-84.6) ; v1@104.798,-84.513 ccw(c104.588,-84.303) 104.884,-84.303 ccw(c105.181,-84.303) v1@104.971,-84.513
NetD31_A: D31.A U33.3 | length 17.6
  Top Layer w0.254: U33.3@100.66,-23.9 101.88,-23.9 ; U33.3@101.462,-24.085 cw(c101.88,-24.468) 101.88,-23.9 ; U33.3@101.462,-23.716 ccw(c101.88,-23.332) 101.88,-23.9 ; D31.A@104.758,-13.141 ccw(c103.985,-13.914) 103.985,-12.82 ccw(c103.985,-11.727) D31.A@104.758,-12.5 ; D31.A@105.079,-12.82 102.75,-12.82 102.235,-13.335 102.235,-23.546 101.88,-23.9
NetD32_A: D32.A U32.3 | length 12.3
  Top Layer w0.254: U32.3@100.66,-59.333 102.818,-59.333 103.734,-60.249 103.734,-65.176 104.115,-65.557 ; U32.3@101.453,-59.526 cw(c101.919,-59.992) 101.919,-59.333 cw(c101.919,-58.674) U32.3@101.453,-59.14 ; D32.A@104.73,-65.847 ccw(c104.115,-66.357) 104.115,-65.557 ; D32.A@104.73,-65.268 cw(c104.115,-64.758) 104.115,-65.557 ; D32.A@105.079,-65.557 104.115,-65.557
NetD39_A: D39.A R97.2 | length 13.5
  Top Layer w0.254: R97.2@98.882,-86.97 100.508,-86.97 101.067,-86.411 101.067,-83.642 101.575,-83.134 104.572,-83.134 105.079,-82.627 ; R97.2@99.368,-87.329 cw(c100.236,-88.196) 100.236,-86.97 cw(c100.236,-85.743) R97.2@99.368,-86.61 ; D39.A@104.841,-82.202 cw(c104.579,-82.627) 105.079,-82.627 ; D39.A@105.079,-81.661 105.079,-82.627 ; D39.A@105.316,-82.202 ccw(c105.579,-82.627) 105.079,-82.627
NetD40_A: D40.A R101.1 | length 7
  Top Layer w0.254: R101.1@104.619,-62.506 ccw(c103.752,-61.639) 104.978,-61.639 ccw(c106.205,-61.639) R101.1@105.337,-62.506 ; D40.A@104.758,-60.673 cw(c104.228,-61.204) 104.978,-61.204 ; R101.1@104.978,-62.865 D40.A@104.978,-60.198 ; 104.978,-61.69 cw(c106.415,-61.69) D40.A@105.399,-60.673 ; 104.978,-61.076 cw(c105.802,-61.076) D40.A@105.22,-60.494
NetD41_A: D41.A R106.2 | length 3
  Top Layer w0.762: R106.2@9.126,-9.406 D41.A@9.126,-6.909 ; 9.126,-9.022 ccw(c9.8,-9.022) R106.2@9.324,-9.498
NetD42_A: D42.A R105.2 | length 2.7
  Top Layer w0.254: D42.A@104.953,-57.506 R105.2@104.953,-54.839
NetD43_A: D43.A R110.1 | length 7.1
  Top Layer w0.254: R110.1@104.594,-49.864 cw(c103.726,-50.731) 104.953,-50.731 cw(c106.179,-50.731) R110.1@105.312,-49.864 ; D43.A@104.758,-51.772 ccw(c104.289,-51.303) 104.953,-51.303 ; D43.A@104.953,-52.73 R110.1@104.953,-50.038 ; 104.953,-51.308 ccw(c105.863,-51.308) D43.A@105.22,-51.952 ; 104.953,-50.695 ccw(c106.477,-50.695) D43.A@105.399,-51.772
NetD49_A: D49.A R114.2 | length 6.4
  Top Layer w0.254: D49.A@104.794,-9.229 107.51,-9.228 R114.2@107.518,-9.22 ; D49.A@105.269,-9.549 cw(c106.045,-10.325) 106.045,-9.228 ; D49.A@105.269,-8.909 ccw(c106.04,-8.138) 106.04,-9.228 ; 106.273,-9.228 ccw(c106.273,-7.975) R114.2@107.159,-8.861 ; 106.311,-9.228 cw(c106.311,-10.428) R114.2@107.159,-9.579
NetD51_A: D51.A R120.1 | length 6.4
  Top Layer w0.254: D51.A@99.231,-9.229 R120.1@102.024,-9.228 ; D51.A@99.706,-9.549 cw(c100.482,-10.325) 100.482,-9.228 ; D51.A@99.706,-8.909 ccw(c100.477,-8.138) 100.477,-9.228 ; 100.786,-9.228 ccw(c100.786,-7.975) R120.1@101.673,-8.861 ; 100.824,-9.228 cw(c100.824,-10.428) R120.1@101.673,-9.579
  Top Layer w0.762: R120.1@102.024,-9.228 R120.1@102.032,-9.22
NetD54_A: D54.A R126.1 | length 6.4
  Top Layer w0.254: D54.A@93.751,-9.196 R126.1@96.52,-9.195 ; D54.A@94.227,-9.516 cw(c95.002,-10.292) 95.002,-9.195 ; D54.A@94.227,-8.875 ccw(c94.998,-8.105) 94.998,-9.195 ; R126.1@96.161,-9.554 ccw(c95.294,-10.421) 95.294,-9.195 ccw(c95.294,-7.968) R126.1@96.161,-8.836
NetD57_A: 
NetD58_A: 
NetD59_A: 
NetR42_1: R42.1 U13.1 | length 5.9
  Top Layer w0.254: U13.1@19.882,-25.832 R42.1@22.809,-25.832 ; U13.1@20.651,-26.049 cw(c21.176,-26.574) 21.176,-25.832 ; U13.1@20.651,-25.663 ccw(c21.058,-25.256) 21.058,-25.832 ; R42.1@22.323,-26.191 ccw(c21.456,-27.058) 21.456,-25.832 ccw(c21.456,-24.605) R42.1@22.323,-25.473
NetR44_1: R44.1 U14.1 | length 5.9
  Top Layer w0.254: U14.1@19.859,-21.793 R44.1@22.809,-21.793 ; U14.1@20.651,-21.985 cw(c21.115,-22.449) 21.115,-21.793 ; U14.1@20.651,-21.599 ccw(c21.12,-21.131) 21.12,-21.793 ; R44.1@22.323,-22.152 ccw(c21.456,-23.02) 21.456,-21.793 ccw(c21.456,-20.567) R44.1@22.323,-21.434
NetR46_1: R46.1 U15.1 | length 15.5
  Top Layer w0.254: U15.1@100.66,-46.125 104.52,-46.125 104.927,-46.533 R46.1@104.927,-46.812 R46.1@104.927,-47.32 ; U15.1@101.453,-46.318 cw(c101.919,-46.784) 101.919,-46.125 cw(c101.919,-45.466) U15.1@101.453,-45.932 ; 101.916,-46.125 cw(c101.916,-49.697) R46.1@104.441,-47.171 ; 102.529,-46.125 cw(c102.529,-49.084) R46.1@104.621,-46.992 ; 103.142,-46.125 cw(c103.142,-48.47) R46.1@104.8,-46.812 ; 103.755,-46.125 cw(c103.755,-47.857) R46.1@104.98,-46.633 ; 104.369,-46.125 cw(c104.369,-47.244) R46.1@105.16,-46.453
NetR47_1: R47.1 U16.1 | length 5.7
  Top Layer w0.254: v1@99.631,-77.962 cw(c99.841,-78.172) 99.841,-77.875 cw(c99.841,-77.578) v1@99.631,-77.788 ; U16.1@99.835,-78.029 ccw(c99.544,-78.228) v1(99.544,-77.875) ; U16.1@99.835,-77.722 cw(c99.544,-77.523) v1(99.544,-77.875) ; U16.1@100.732,-77.875 U16.1@100.66,-77.875 v1(99.544,-77.875)
  Bottom Layer w0.254: R47.1@98.527,-77.876 R47.1@98.527,-77.876 v1(99.544,-77.875) ; R47.1@99.091,-77.617 ccw(c99.544,-77.349) v1(99.544,-77.875) ; R47.1@99.091,-78.134 cw(c99.544,-78.4) v1(99.544,-77.875) ; v1@99.433,-77.93 ccw(c99.218,-78.037) 99.28,-77.805 ccw(c99.343,-77.572) v1@99.476,-77.773 ; v1@99.433,-77.821 cw(c99.22,-77.716) 99.281,-77.946 cw(c99.343,-78.176) v1@99.475,-77.978 ; v1@99.457,-77.962 ccw(c99.247,-78.172) 99.247,-77.875 ccw(c99.247,-77.578) v1@99.457,-77.788
NetR48_1: R48.1 U17.1 | length 6.1
  Top Layer w0.254: U17.1@55.012,-69.112 55.013,-69.113 R48.1@57.531,-69.113 R48.1@58.141,-69.113 ; U17.1@55.805,-69.305 cw(c56.268,-69.769) 56.268,-69.113 ; U17.1@55.805,-68.919 ccw(c56.273,-68.451) 56.273,-69.113 ; R48.1@57.045,-69.473 ccw(c56.178,-70.34) 56.178,-69.113 ccw(c56.178,-67.887) R48.1@57.045,-68.754
NetR52_1: R52.1 U18.1 | length 9.2
  Top Layer w0.254: U18.1@100.66,-42.188 102.338,-42.188 102.768,-41.758 R52.1@104.877,-41.758 ; U18.1@101.453,-42.381 cw(c101.919,-42.847) 101.919,-42.188 cw(c101.919,-41.529) U18.1@101.453,-41.995 ; 102.91,-41.758 ccw(c102.91,-39.664) R52.1@104.39,-41.144 ; 103.523,-41.758 ccw(c103.523,-40.277) R52.1@104.57,-41.324 ; R52.1@104.39,-41.863 ccw(c104.136,-42.117) 104.136,-41.758 ccw(c104.136,-40.89) R52.1@104.75,-41.504
NetR53_1: R53.1 U19.1 | length 5.9
  Top Layer w0.254: U19.1@19.908,-17.729 R53.1@22.809,-17.729 ; U19.1@20.651,-17.972 cw(c21.237,-18.558) 21.237,-17.729 ; U19.1@20.651,-17.586 ccw(c20.997,-17.24) 20.997,-17.729 ; R53.1@22.323,-18.088 ccw(c21.456,-18.956) 21.456,-17.729 ccw(c21.456,-16.503) R53.1@22.323,-17.37
NetR55_1: R55.1 U20.1 | length 5.7
  Top Layer w0.254: v1@99.631,-73.898 cw(c99.841,-74.108) 99.841,-73.811 cw(c99.841,-73.514) v1@99.631,-73.724 ; U20.1@99.835,-73.965 ccw(c99.544,-74.164) v1(99.544,-73.811) ; U20.1@99.835,-73.658 cw(c99.544,-73.459) v1(99.544,-73.811) ; U20.1@100.732,-73.811 U20.1@100.66,-73.811 v1(99.544,-73.811)
  Bottom Layer w0.254: R55.1@98.527,-73.812 v1(99.544,-73.811) ; R55.1@99.091,-73.553 ccw(c99.544,-73.285) v1(99.544,-73.811) ; R55.1@99.091,-74.07 cw(c99.544,-74.336) v1(99.544,-73.811) ; v1@99.433,-73.866 ccw(c99.218,-73.973) 99.28,-73.741 ccw(c99.343,-73.508) v1@99.476,-73.709 ; v1@99.433,-73.757 cw(c99.22,-73.652) 99.281,-73.882 cw(c99.343,-74.112) v1@99.475,-73.914 ; v1@99.457,-73.898 ccw(c99.247,-74.108) 99.247,-73.811 ccw(c99.247,-73.514) v1@99.457,-73.724
NetR56_1: R56.1 U21.1 | length 6.1
  Top Layer w0.254: U21.1@55.012,-65.048 55.013,-65.049 R56.1@57.531,-65.049 R56.1@58.141,-65.049 ; U21.1@55.805,-65.241 cw(c56.268,-65.705) 56.268,-65.049 ; U21.1@55.805,-64.855 ccw(c56.273,-64.387) 56.273,-65.049 ; R56.1@57.045,-65.409 ccw(c56.178,-66.276) 56.178,-65.049 ccw(c56.178,-63.823) R56.1@57.045,-64.69
NetR60_1: R60.1 U22.1 | length 6
  Top Layer w0.254: U22.1@19.859,-44.704 R60.1@22.911,-44.704 ; U22.1@20.651,-44.896 cw(c21.115,-45.36) 21.115,-44.704 ; U22.1@20.651,-44.51 ccw(c21.12,-44.041) 21.12,-44.704 ; R60.1@22.425,-45.063 ccw(c21.557,-45.93) 21.557,-44.704 ccw(c21.557,-43.478) R60.1@22.425,-44.345
NetR62_1: R62.1 U23.1 | length 13.1
  Top Layer w0.254: v1(99.237,-38.251) U23.1@100.66,-38.251 ; v1@99.298,-38.358 cw(c99.519,-38.741) 99.634,-38.314 ; v1@99.298,-38.145 ccw(c99.519,-37.762) 99.634,-38.189 ; v1@99.324,-38.338 cw(c99.534,-38.548) 99.534,-38.251 cw(c99.534,-37.954) v1@99.324,-38.164 ; U23.1@99.867,-38.444 ccw(c99.401,-38.91) 99.401,-38.251 ccw(c99.401,-37.592) U23.1@99.867,-38.058 ; v1@103.821,-38.908 ccw(c103.969,-38.651) 104.046,-38.938 ccw(c104.122,-39.224) v1@103.866,-39.076 ; v1@103.846,-39.101 cw(c104.056,-39.311) 104.056,-39.014 cw(c104.056,-38.717) v1@103.846,-38.927 ; 104.039,-39.014 cw(c104.039,-39.547) R62.1@104.416,-39.17 ; 104.122,-39.014 ccw(c104.122,-38.573) R62.1@104.536,-38.724 ; R62.1@104.298,-38.637 cw(c103.759,-38.441) v1(103.759,-39.014) R62.1@104.902,-39.014
  Bottom Layer w0.254: v1@99.237,-38.374 cw(c99.237,-38.671) 99.447,-38.461 cw(c99.657,-38.251) v1@99.36,-38.251 ; v1(99.237,-38.251) 100,-39.014 v1(103.759,-39.014) ; v1@103.672,-39.101 ccw(c103.462,-39.311) 103.462,-39.014 ccw(c103.462,-38.717) v1@103.672,-38.927
NetR63_1: R63.1 U24.1 | length 10.3
  Top Layer w0.254: U24.1@100.66,-69.747 102.259,-69.747 102.997,-70.485 102.997,-73.025 103.53,-73.558 R63.1@104.902,-73.558 ; U24.1@101.453,-69.94 cw(c101.919,-70.406) 101.919,-69.747 cw(c101.919,-69.088) U24.1@101.453,-69.554 ; R63.1@104.416,-73.918 ccw(c103.549,-74.785) 103.549,-73.558 ccw(c103.549,-72.332) R63.1@104.416,-73.199
NetR64_1: R64.1 U25.1 | length 14.9
  Top Layer w0.254: v1(99.288,-34.314) U25.1@100.66,-34.314 ; v1@99.349,-34.421 cw(c99.548,-34.765) 99.651,-34.381 ; v1@99.349,-34.208 ccw(c99.548,-33.864) 99.651,-34.248 ; v1@99.375,-34.401 cw(c99.585,-34.611) 99.585,-34.314 cw(c99.585,-34.017) v1@99.375,-34.227 ; U25.1@99.867,-34.507 ccw(c99.401,-34.973) 99.401,-34.314 ccw(c99.401,-33.655) U25.1@99.867,-34.121 ; v1@103.846,-33.66 cw(c104.075,-34.057) R64.1@104.194,-33.614 ; v1@103.846,-33.447 ccw(c103.994,-33.19) 104.071,-33.477 ccw(c104.148,-33.763) v1@103.891,-33.615 ; v1@103.871,-33.64 cw(c104.081,-33.85) 104.081,-33.553 cw(c104.081,-33.256) v1@103.871,-33.466 ; v1@103.967,-33.553 cw(c103.967,-34.259) R64.1@104.467,-33.76 ; 104.185,-33.553 ccw(c104.185,-33.099) R64.1@104.596,-33.293 ; R64.1@104.366,-33.184 cw(c103.784,-32.91) v1(103.784,-33.553) R64.1@104.953,-33.553
  Bottom Layer w0.254: v1@99.157,-34.323 cw(c99.638,-34.292) 99.297,-33.951 ; v1@99.201,-34.227 ccw(c98.991,-34.017) 99.288,-34.017 ccw(c99.585,-34.017) v1@99.375,-34.227 ; v1(99.288,-34.314) 99.288,-33.961 99.695,-33.553 ; v1@99.41,-34.307 cw(c100.387,-34.245) 99.695,-33.553 ; v1@103.697,-33.64 ccw(c103.487,-33.85) 103.487,-33.553 ccw(c103.487,-33.256) v1@103.697,-33.466 ; v1(103.784,-33.553) 99.695,-33.553
NetR68_1: R68.1 U26.1 | length 6
  Top Layer w0.254: U26.1@19.866,-40.818 R68.1@22.911,-40.818 ; U26.1@20.651,-41.003 cw(c21.098,-41.45) 21.098,-40.818 ; U26.1@20.651,-40.617 ccw(c21.136,-40.132) 21.136,-40.818 ; R68.1@22.425,-41.177 ccw(c21.557,-42.044) 21.557,-40.818 ccw(c21.557,-39.591) R68.1@22.425,-40.459
NetR70_1: R70.1 U27.1 | length 6.1
  Top Layer w0.254: U27.1@55.012,-60.857 55.013,-60.858 R70.1@57.531,-60.858 R70.1@58.141,-60.858 ; U27.1@55.805,-61.05 cw(c56.268,-61.514) 56.268,-60.858 ; U27.1@55.805,-60.664 ccw(c56.273,-60.196) 56.273,-60.858 ; R70.1@57.045,-61.218 ccw(c56.178,-62.085) 56.178,-60.858 ccw(c56.178,-59.632) R70.1@57.045,-60.499
NetR71_1: R71.1 U28.1 | length 5.7
  Top Layer w0.254: v1@99.631,-65.897 cw(c99.841,-66.107) 99.841,-65.81 cw(c99.841,-65.513) v1@99.631,-65.723 ; U28.1@99.835,-65.964 ccw(c99.544,-66.163) v1(99.544,-65.81) ; U28.1@99.835,-65.657 cw(c99.544,-65.458) v1(99.544,-65.81) ; U28.1@100.732,-65.81 U28.1@100.66,-65.81 v1(99.544,-65.81)
  Bottom Layer w0.254: R71.1@98.527,-65.811 v1(99.544,-65.81) ; R71.1@99.091,-65.552 ccw(c99.544,-65.284) v1(99.544,-65.81) ; R71.1@99.091,-66.069 cw(c99.544,-66.335) v1(99.544,-65.81) ; v1@99.433,-65.865 ccw(c99.218,-65.972) 99.28,-65.74 ccw(c99.343,-65.507) v1@99.476,-65.708 ; v1@99.433,-65.756 cw(c99.22,-65.651) 99.281,-65.881 cw(c99.343,-66.111) v1@99.475,-65.913 ; v1@99.457,-65.897 ccw(c99.247,-66.107) 99.247,-65.81 ccw(c99.247,-65.513) v1@99.457,-65.723
NetR72_1: R72.1 U29.1 | length 12.2
  Top Layer w0.254: v1@99.505,-30.483 cw(c99.65,-30.727) 99.724,-30.453 cw(c99.797,-30.178) v1@99.549,-30.317 ; v1@99.505,-30.272 ccw(c99.65,-30.027) 99.724,-30.302 ccw(c99.797,-30.576) v1@99.549,-30.438 ; v1@99.529,-30.464 cw(c99.739,-30.674) 99.739,-30.377 cw(c99.739,-30.08) v1@99.529,-30.29 ; U29.1@99.858,-30.561 ccw(c99.442,-30.941) v1(99.442,-30.377) ; U29.1@99.858,-30.193 cw(c99.442,-29.814) v1(99.442,-30.377) ; U29.1@100.66,-30.377 v1(99.442,-30.377) ; v1@103.967,-30.836 cw(c103.967,-31.542) R72.1@104.467,-31.042 ; v1@103.973,-30.942 cw(c104.146,-31.242) R72.1@104.236,-30.908 ; v1@103.998,-30.923 cw(c104.208,-31.133) 104.208,-30.836 cw(c104.208,-30.539) v1@103.998,-30.749 ; v1@104.018,-30.774 ccw(c104.232,-30.65) 104.168,-30.889 ; R72.1@104.344,-30.523 cw(c103.911,-30.38) v1(103.911,-30.836) R72.1@104.953,-30.836
  Bottom Layer w0.254: v1@99.442,-30.5 cw(c99.442,-30.797) 99.652,-30.587 cw(c99.862,-30.377) v1@99.565,-30.377 ; v1(99.442,-30.377) 99.9,-30.836 v1(103.911,-30.836) ; v1@103.824,-30.923 ccw(c103.614,-31.133) 103.614,-30.836 ccw(c103.614,-30.539) v1@103.824,-30.749
NetR76_1: R76.1 U30.1 | length 6
  Top Layer w0.254: U30.1@19.896,-36.652 R76.1@22.911,-36.652 ; U30.1@20.651,-36.883 cw(c21.209,-37.442) 21.209,-36.652 ; U30.1@20.651,-36.497 ccw(c21.025,-36.124) 21.025,-36.652 ; R76.1@22.425,-37.011 ccw(c21.557,-37.879) 21.557,-36.652 ccw(c21.557,-35.426) R76.1@22.425,-36.293
NetR78_1: R78.1 U31.1 | length 6
  Top Layer w0.254: U31.1@55.012,-56.666 55.013,-56.667 R78.1@57.531,-56.667 R78.1@58.014,-56.667 ; U31.1@55.805,-56.859 cw(c56.268,-57.323) 56.268,-56.667 ; U31.1@55.805,-56.473 ccw(c56.273,-56.005) 56.273,-56.667 ; R78.1@57.045,-57.027 ccw(c56.178,-57.894) 56.178,-56.667 ccw(c56.178,-55.441) R78.1@57.045,-56.308
NetR79_1: R79.1 U32.1 | length 5.7
  Top Layer w0.254: v1@99.631,-61.96 cw(c99.841,-62.17) 99.841,-61.873 cw(c99.841,-61.576) v1@99.631,-61.786 ; U32.1@99.835,-62.027 ccw(c99.544,-62.226) v1(99.544,-61.873) ; U32.1@99.835,-61.72 cw(c99.544,-61.521) v1(99.544,-61.873) ; U32.1@100.732,-61.873 U32.1@100.66,-61.873 v1(99.544,-61.873)
  Bottom Layer w0.254: R79.1@98.527,-61.874 v1(99.544,-61.873) ; R79.1@99.091,-61.615 ccw(c99.544,-61.347) v1(99.544,-61.873) ; R79.1@99.091,-62.132 cw(c99.544,-62.398) v1(99.544,-61.873) ; v1@99.433,-61.928 ccw(c99.218,-62.035) 99.28,-61.803 ccw(c99.343,-61.57) v1@99.476,-61.771 ; v1@99.433,-61.819 cw(c99.22,-61.714) 99.281,-61.944 cw(c99.343,-62.174) v1@99.475,-61.976 ; v1@99.457,-61.96 ccw(c99.247,-62.17) 99.247,-61.873 ccw(c99.247,-61.576) v1@99.457,-61.786
NetR80_1: R80.1 U33.1 | length 11.4
  Top Layer w0.254: v1@99.505,-26.546 cw(c99.65,-26.79) 99.724,-26.516 cw(c99.797,-26.241) v1@99.549,-26.38 ; v1@99.505,-26.335 ccw(c99.65,-26.09) 99.724,-26.365 ccw(c99.797,-26.639) v1@99.549,-26.501 ; v1@99.529,-26.527 cw(c99.739,-26.737) 99.739,-26.44 cw(c99.739,-26.143) v1@99.529,-26.353 ; U33.1@99.858,-26.624 ccw(c99.442,-27.004) v1(99.442,-26.44) ; U33.1@99.858,-26.256 cw(c99.442,-25.877) v1(99.442,-26.44) ; U33.1@100.66,-26.44 v1(99.442,-26.44) ; v1(103.886,-25.248) R80.1@104.978,-25.248 ; v1@103.973,-25.335 cw(c104.183,-25.545) 104.183,-25.248 cw(c104.183,-24.951) v1@103.973,-25.161
  Bottom Layer w0.254: v1@99.355,-26.353 ccw(c99.145,-26.143) 99.442,-26.143 ccw(c99.739,-26.143) v1@99.529,-26.353 ; v1(99.442,-26.44) 99.442,-25.729 99.924,-25.248 v1(103.886,-25.248) ; v1@103.799,-25.335 ccw(c103.589,-25.545) 103.589,-25.248 ccw(c103.589,-24.951) v1@103.799,-25.161
NetR84_1: R84.1 U34.1 | length 6
  Top Layer w0.254: U34.1@19.859,-63.449 R84.1@22.86,-63.449 ; U34.1@20.651,-63.641 cw(c21.115,-64.105) 21.115,-63.449 ; U34.1@20.651,-63.255 ccw(c21.12,-62.787) 21.12,-63.449 ; R84.1@22.374,-63.808 ccw(c21.507,-64.676) 21.507,-63.449 ccw(c21.507,-62.223) R84.1@22.374,-63.09
NetR86_1: R86.1 U35.1 | length 6
  Top Layer w0.254: U35.1@19.859,-59.411 R86.1@22.86,-59.411 ; U35.1@20.651,-59.603 cw(c21.115,-60.066) 21.115,-59.411 ; U35.1@20.651,-59.217 ccw(c21.12,-58.748) 21.12,-59.411 ; R86.1@22.374,-59.77 ccw(c21.507,-60.637) 21.507,-59.411 ccw(c21.507,-58.184) R86.1@22.374,-59.051
NetR88_1: R88.1 U36.1 | length 6
  Top Layer w0.254: U36.1@19.858,-55.32 R88.1@22.86,-55.321 ; U36.1@20.651,-55.513 cw(c21.117,-55.979) 21.117,-55.32 cw(c21.117,-54.661) U36.1@20.651,-55.127 ; 21.504,-55.32 cw(c21.504,-56.55) R88.1@22.374,-55.68 ; 21.509,-55.32 ccw(c21.509,-54.097) R88.1@22.374,-54.962
NetR90_1: R90.1 U37.1 | length 5.9
  Top Layer w0.254: U37.1@19.859,-81.991 R90.1@22.758,-81.991 ; U37.1@20.651,-82.183 cw(c21.115,-82.647) 21.115,-81.991 ; U37.1@20.651,-81.797 ccw(c21.12,-81.329) 21.12,-81.991 ; R90.1@22.272,-82.35 ccw(c21.405,-83.218) 21.405,-81.991 ccw(c21.405,-80.765) R90.1@22.272,-81.632